# Altium PCB Ethernet_Adapter.PcbDoc
Units mm, origin at the board's own origin, x right, y up, seen from the top; angles counter-clockwise.
Board outline 62 x 23 mm, 4 copper layers ([1] Signal, [2] GND, [3] Power, [4] Signal), stack 1.586 mm thick; 58 components, 44 nets, 217 pads, 280 vias.
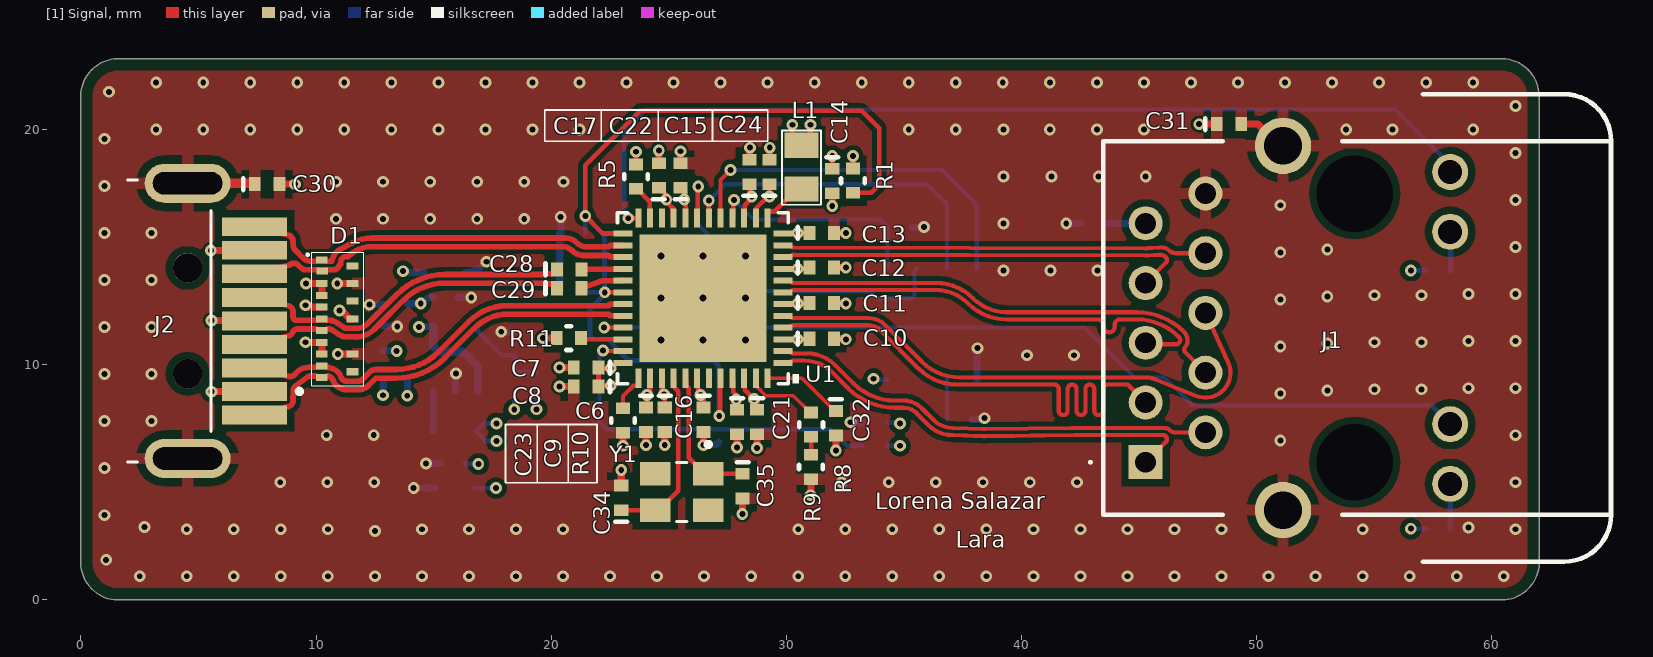
[diagram p0: [1] Signal view]
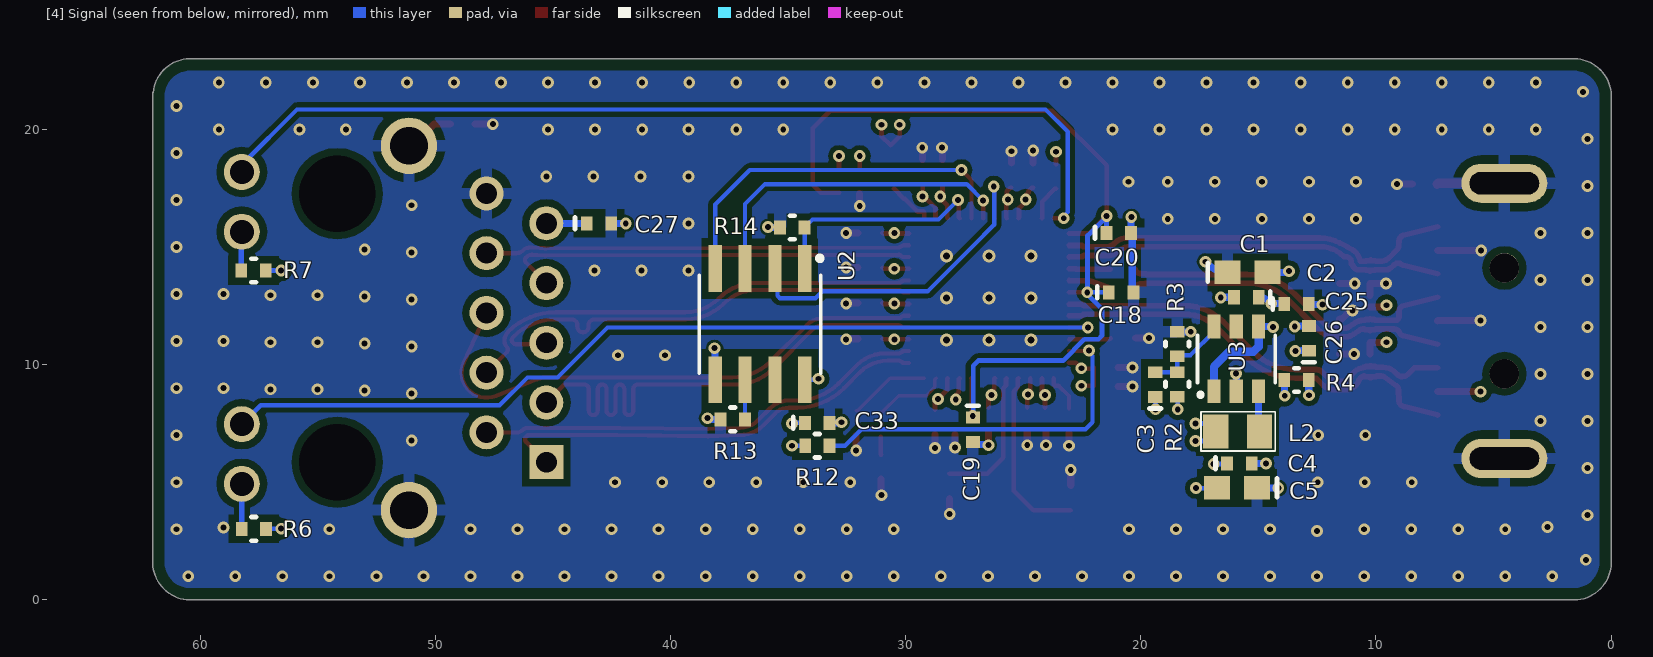
[diagram p1: [4] Signal view, seen from below]
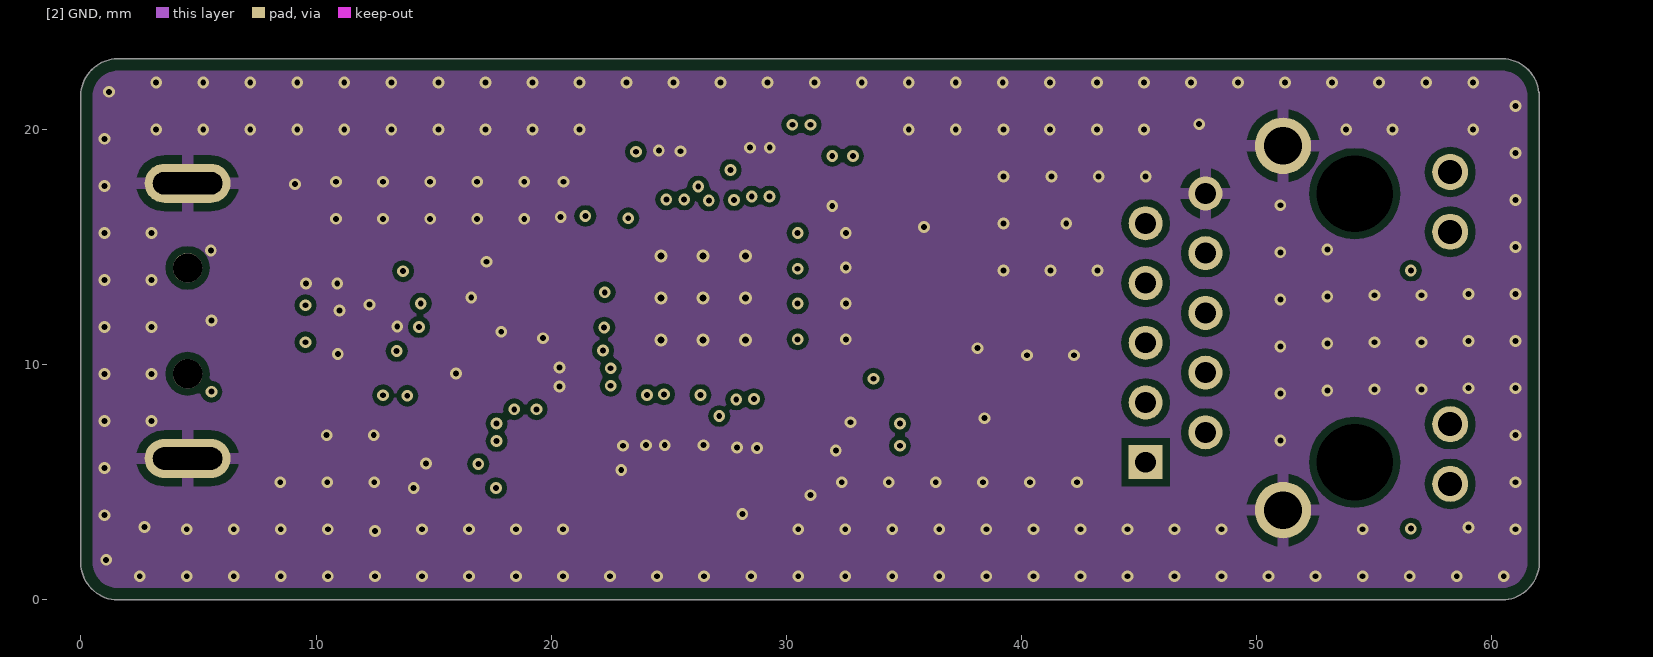
[diagram p2: [2] GND]
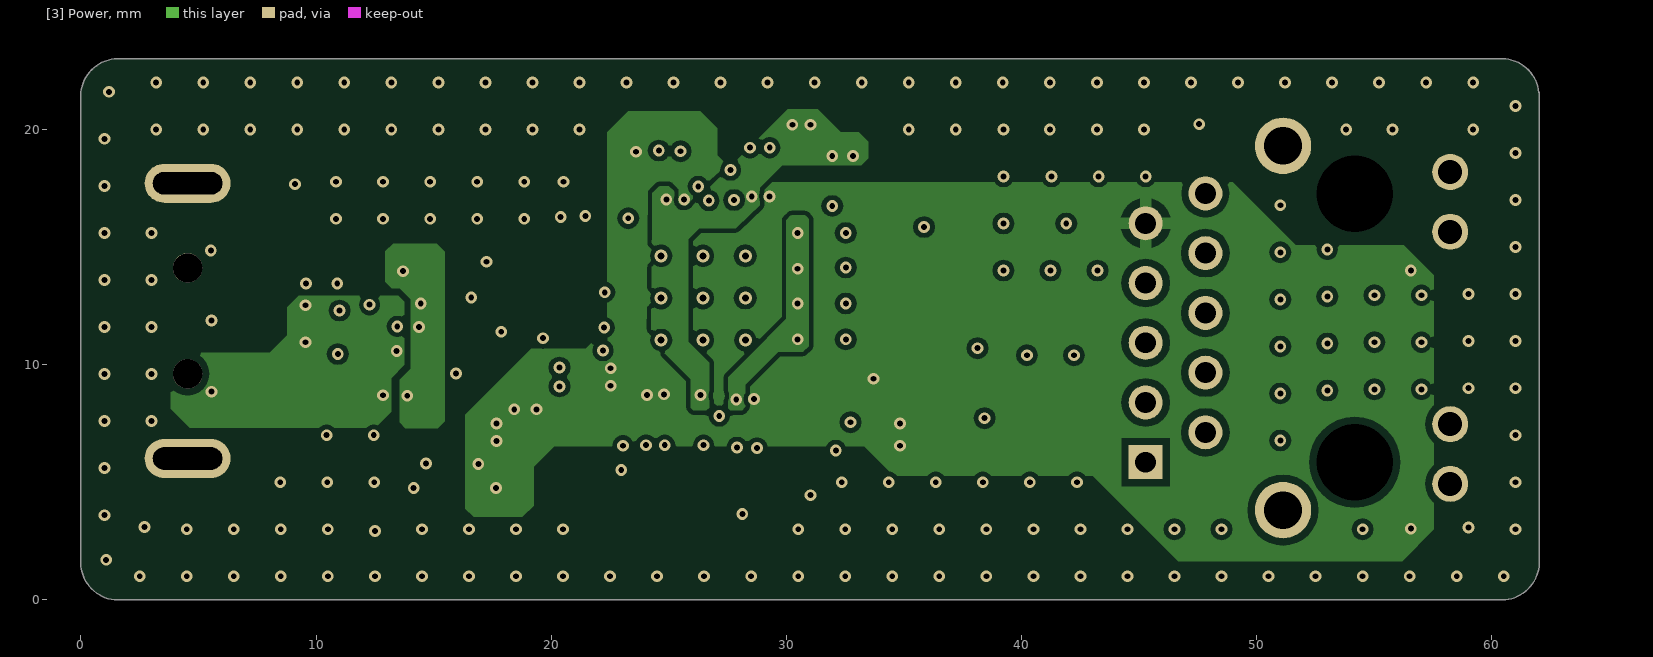
[diagram p3: [3] Power]
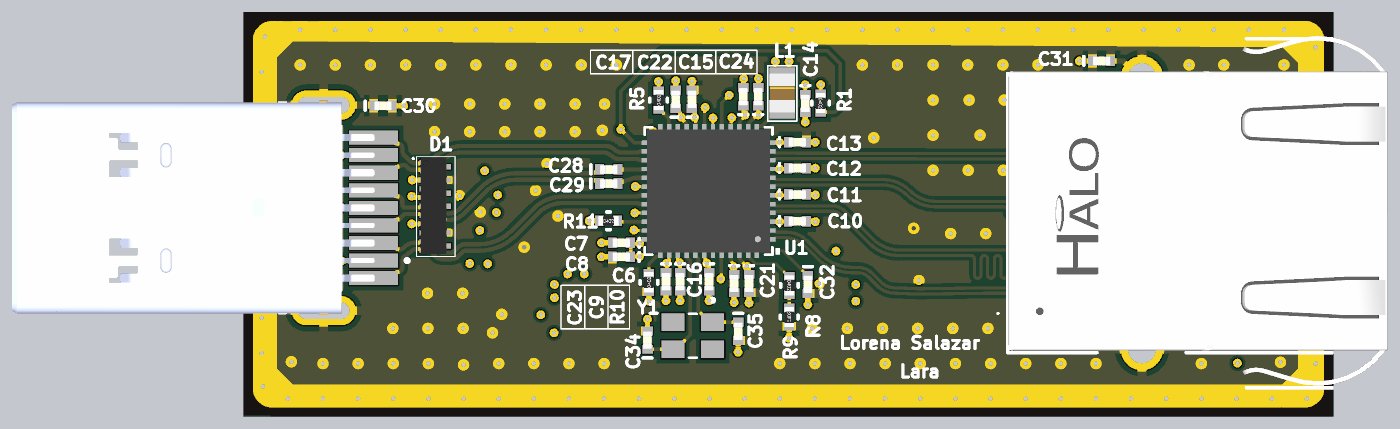
[diagram p4: 3D render of the assembled board from above, using the file's embedded part models]
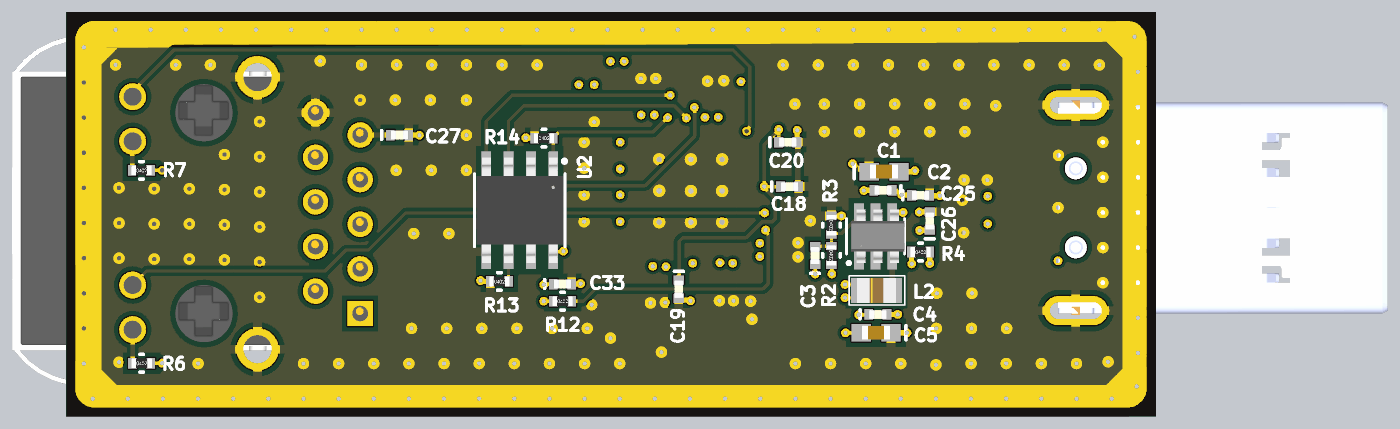
[diagram p5: 3D render of the assembled board from below, using the file's embedded part models]

## Layer stack, top to bottom
Top Solder: solder mask 0.0102, Solder Resist, Dk 3.5
[1] Signal: signal copper 0.035
Dielectric 2: prepreg 0.2104, PP-023, Dk 4.5
[2] GND: signal copper 0.0152
Dielectric 1: core 1.065, Core-043, Dk 4.3
[3] Power: signal copper 0.0152
Dielectric 3: prepreg 0.2104, PP-023, Dk 4.5
[4] Signal: signal copper 0.035
Bottom Solder: solder mask 0.0102, Solder Resist, Dk 3.5

## Board outline
0,1.432 0,21.575 cw(c1.595,21.401) 1.429,22.997 1.429,23 60.575,23 cw(c60.401,21.405) 61.997,21.571 62,21.575 62,1.425 cw(c60.405,1.599) 60.571,0.003 60.575,0 1.425,0 cw(c1.599,1.595)

## Design rules (kind name [scope] priority, off if disabled: settings)
BoardOutlineClearance [All] p1: gap=0.5 ignorepadtopadclearanceinfootprint=FALSE
Clearance [All] p1: gap=0.254 ignorepadtopadclearanceinfootprint=FALSE except(0.127: Arc-Arc Arc-Track Arc-SMDPad Arc-Via Track-Track Track-SMDPad Track-Via SMDPad-Via; 0.152: SMDPad-SMDPad; 0.203: Arc-Fill Arc-Poly Arc-Region Track-Fill Track-Poly Track-Region Via-Fill Via-Poly Via-Region Fill-Fill Fill-Poly Fill-Region Poly-Poly Poly-Region Region-Region; 0.25: Via-Via; 0.3: SMDPad-Fill SMDPad-Poly SMDPad-Region THPad-Fill THPad-Poly THPad-Region; 0.35: SMDPad-THPad THPad-THPad THPad-Via THPad-Text THPad-Hole)
DiffPairsRouting 100_OHM_DIFF [InDifferentialPairClass('100_OHM_DIFF')] p1: maxlimit=0.127 minlimit=0.127 mostfreqgap=0.127 toplayer_minwidth=0.178 toplayer_maxwidth=0.178 toplayer_prefwidth=0.178 midlayer1_minwidth=0.114 midlayer1_maxwidth=0.114 midlayer1_prefwidth=0.114 midlayer2_minwidth=0.114 midlayer2_maxwidth=0.114 midlayer2_prefwidth=0.114 bottomlayer_minwidth=0.178 bottomlayer_maxwidth=0.178 bottomlayer_prefwidth=0.178 impedanceprofiledriven=TRUE impedanceprofileid={C5B9D700-E3F4-46DA-8C66-BA4D82D806B2} impedanceprofilevalue=100.000000 maxuncoupledlength=12.7
DiffPairsRouting 90_OHM_DIFF [InDifferentialPairClass('90_OHM_DIFF')] p2: maxlimit=0.127 minlimit=0.127 mostfreqgap=0.127 toplayer_minwidth=0.24 toplayer_maxwidth=0.24 toplayer_prefwidth=0.24 midlayer1_minwidth=0.159 midlayer1_maxwidth=0.159 midlayer1_prefwidth=0.159 midlayer2_minwidth=0.159 midlayer2_maxwidth=0.159 midlayer2_prefwidth=0.159 bottomlayer_minwidth=0.24 bottomlayer_maxwidth=0.24 bottomlayer_prefwidth=0.24 impedanceprofiledriven=TRUE impedanceprofileid={D9126BFB-9540-4543-8F74-479AA3BEF8F5} impedanceprofilevalue=90.000000 maxuncoupledlength=12.7
HoleSize [All] p1: absolutevalues=TRUE maxlimit=2.54 minlimit=0.25 maxpercent=80.000 minpercent=20.000
MinimumSolderMaskSliver [All] p1: minsoldermaskwidth=0.1
PolygonConnect [All] p1: thpad.connectstyle=Relief thpad.reliefconductorwidth=0.5 thpad.reliefentries=4 thpad.polygonreliefangle="90 Angle" thpad.airgapwidth=0.35 smdpad.connectstyle=Relief smdpad.reliefconductorwidth=0.5 smdpad.reliefentries=4 smdpad.polygonreliefangle="90 Angle" smdpad.airgapwidth=0.3 via.connectstyle=Direct via.reliefconductorwidth=0.254 via.reliefentries=4 via.polygonreliefangle="90 Angle" via.airgapwidth=0.254
RoutingVias [All] p1: holewidth=0.25 width=0.5 viastyle="Through Hole" minholewidth=0.2 minwidth=0.2 maxholewidth=0.6 maxwidth=0.6
SilkToSolderMaskClearance [IsPad] p1: minsilkscreentomaskgap=0.15 clearancetoexposedcopper=TRUE
SolderMaskExpansion [All] p1: expansion=0.076 istentingtop=FALSE
Width [All] p1: maxlimit=2 minlimit=0.1 preferedwidth=0.2 minimp=50.000000 maximp=50.000000 favimp=50.000000
26 further rules are at their usual default settings.

## Classes and differential pairs
differential pair class 100_OHM_DIFF: TR0 TR1 TR2 TR3
differential pair class 90_OHM_DIFF: USB_D USB_RX USB_TX
differential pair USB_TX: +USB_TX_P -USB_TX_N
differential pair USB_RX: +USB_RX_P -USB_RX_N
differential pair USB_D: +USB_D_P -USB_D_N
differential pair TR3: +TR3_P -TR3_N
differential pair TR2: +TR2_P -TR2_N
differential pair TR1: +TR1_P -TR1_N
differential pair TR0: +TR0_P -TR0_N

## Components (designator, comment, footprint, x,y, rotation, side; value= is the part's Value field where it differs from the comment)
C1 "22uF" "Capacitor 0603" 16.345,13.925 r180 bottom
C2 "100nF" "Capacitor 0402" 16.016,12.866 r180 bottom
C3 "12pF" "Capacitor 0402" 19.382,9.658 r270 bottom
C4 "100nF" "Capacitor 0402" 15.297,5.797 r0 bottom
C5 "22uF" "Capacitor 0603" 15.018,4.756 r0 bottom
C6 "100nF" "Capacitor 0402" 24.025,7.15 r90 top
C7 "1uF" "Capacitor 0402" 20.975,9.875 r0 top
C8 "10uF" "Capacitor 0402" 20.975,9.075 r0 top
C9 "1uF" "Capacitor 0402" 27.9,7.05 r90 top
C10 "100nF" "Capacitor 0402" 32.008,11.1 r180 top
C11 "100nF" "Capacitor 0402" 32.008,12.625 r180 top
C12 "100nF" "Capacitor 0402" 32.008,14.125 r180 top
C13 "100nF" "Capacitor 0402" 32.008,15.6 r180 top
C14 "100nF" "Capacitor 0402" 31.95,17.3 r90 top
C15 "22uF" "Capacitor 0402" 28.425,18.7 r270 top
C16 "1uF" "Capacitor 0402" 26.475,7.15 r90 top
C17 "1uF" "Capacitor 0402" 24.575,18.55 r270 top
C18 "1uF" "Capacitor 0402" 20.325,13.075 r0 bottom
C19 "1uF" "Capacitor 0402" 27.139,6.725 r90 bottom
C20 "1uF" "Capacitor 0402" 20.425,15.6 r0 bottom
C21 "100nF" "Capacitor 0402" 28.75,7.05 r90 top
C22 "100nF" "Capacitor 0402" 25.5,18.55 r270 top
C23 "100nF" "Capacitor 0402" 24.825,7.15 r90 top
C24 "100nF" "Capacitor 0402" 29.275,18.7 r270 top
C25 "1uF" "Capacitor 0402" 12.867,12.575 r0 bottom
C26 "1uF" "Capacitor 0402" 12.85,11.625 r270 bottom
C27 "100nF" "Capacitor 0402" 42.529,16.008 r0 bottom
C28 "100nF" "Capacitor 0402" 21.275,14.05 r180 top
C29 "100nF" "Capacitor 0402" 21.275,13.25 r180 top
C30 "220pF" "Capacitor 0402" 8.425,17.675 r180 top
C31 "220pF" "Capacitor 0402" 49.328,20.226 r180 top
C32 "1uF" "Capacitor 0402" 32.1,7 r90 top
C33 "100nF" "Capacitor 0402" 33.25,7.525 r0 bottom
C34 "16pF" "Capacitor 0402" 22.974,4.842 r270 top
C35 "16pF" "Capacitor 0402" 28.137,4.327 r90 top
D1 "ESD7008MUTAG" ESD7008MUTAG 10.896,11.948 r270 top
J1 "HFJ11-1G01E-L12RL" HFJ111G01EL12RL 45.275,5.85 r90 top
J2 "GSB316441CEU" AMPHENOL_GSB316441CEU 4.54,11.861 r270 top
L1 "LSQNA201212T4R7M" IND_LSQN_A201212_TAY 30.638,18.4 r270 top
L2 "LSQNA201212T4R7M" IND_LSQN_A201212_TAY 15.883,7.158 r180 bottom
R1 "0" "Resistencia 0402" 32.825,17.825 r270 top
R2 "54.2K" "Resistencia 0402" 18.448,9.158 r270 bottom
R3 "12K" "Resistencia 0402" 18.448,10.878 r270 bottom
R4 "0" "Resistencia 0402" 13.375,9.35 r180 bottom
R5 "10K" "Resistencia 0402" 23.6,17.996 r90 top
R6 "220" "Resistencia 0402" 57.711,3.017 r180 bottom
R7 "220" "Resistencia 0402" 57.723,13.999 r180 bottom
R8 "1K" "Resistencia 0402" 31.05,7.45 r270 top
R9 "1K" "Resistencia 0402" 31.037,5.646 r90 top
R10 "12K" "Resistencia 0402" 23.05,7.625 r90 top
R11 "10K" "Resistencia 0402" 20.75,11.125 r0 top
R12 "1K" "Resistencia 0402" 33.75,6.55 r180 bottom
R13 "10K" "Resistencia 0402" 37.35,7.675 r180 bottom
R14 "10K" "Resistencia 0402" 34.814,15.834 r180 bottom
U1 "LAN7800/Y9X" SQFN48_7X7_Y9X_MCH 26.45,12.825 r180 top
U2 "93AA66C-I/SN" SOIC8-N_MC_MCH 36.189,11.725 r270 bottom
U3 "TLV62568PDDCR" DDC0006A_TEX 15.936,10.242 r90 bottom
Y1 "SXT32411BB17-25.000MT" XTAL_SXT32411BB17-25.000MT 25.55,4.581 r270 top

## Footprints (in the part's own frame and the unit in brackets; to place one, negate y for a bottom-side part, rotate by r counter-clockwise, add the part's x,y. Pads: shape width x height; smd on the part's side, far side on the other; paste and mask are expansions set on the pad)
AMPHENOL_GSB316441CEU [mm]
  rect 0.8x2.78 smd: 1(3,2.84) 2(1,2.84) 3(-1,2.84) 4(-3,2.84) 5(-4,2.84) 6(-2,2.84) 7(0,2.84) 8(2,2.84) 9(4,2.84)
  oval 1.66x3.66 hole 0.95 slot 2.95 at 90 deg: SH1(-5.85,0) SH2(5.85,0)
  round 1.25 hole 1.25 unplated: ""(-2.25,0) ""(2.25,0)
  silkscreen extent -6,-2.55 6,4.85, body extent -6,-17.75 6,2.9, height 3.2
"Capacitor 0402" [mm] "Capacitor 0402"
  rect 0.5x0.6 smd: 1(-0.015,0) 2(1.031,0)
  silkscreen extent 1.52,-0.25 1.52,0.25, body extent 0.01,-0.26 1.01,0.27, height 0.36
"Capacitor 0603" [mm] "Chip Capacitor 0603 SMD"
  rect 1.1x1 smd: 1(0.039,0) 2(1.739,0)
  silkscreen extent -0.81,-0.4 -0.81,0.4, body extent 0.09,-0.4 1.69,0.4, height 0.9
DDC0006A_TEX [mil]
  rect 39.5x22 smd paste+0 mask+0: 1(-54.25,37.4) 2(-54.25,0) 3(-54.25,-37.4) 4(54.25,-37.4) 5(54.25,0) 6(54.25,37.4)
  silkscreen extent -62,-65 40,65, body extent -60,-65 60,55, height 43
ESD7008MUTAG [mm]
  rect 0.3x0.5 smd: 1(-2.5,-0.65) 2(-2.032,-0.635) 3(-1.5,-0.65) 4(-1,-0.65) 5(-0.5,-0.65) 6(0,-0.65) 7(0.5,-0.65) 8(1,-0.65) 9(1.5,-0.65) 10(2,-0.65) 11(2.5,-0.65) 12(2.25,0.65) 13(1.5,0.65) 15(0,0.65) 16(-0.75,0.65) 17(-1.5,0.65) 18(-2.25,0.65)
  silkscreen extent -2.83,-1.3 2.85,1.12, body extent -2.78,-0.86 2.72,0.66, height 0.52
HFJ111G01EL12RL [mm]
  rect 1.446x1.446 hole 0.89: 1(0,0)
  round 1.446 hole 0.89: 2(1.27,-2.54) 3(2.54,0) 4(3.81,-2.54) 5(5.08,0) 6(6.35,-2.54) 7(7.62,0) 8(8.89,-2.54) 9(10.16,0) 10(11.43,-2.54)
  round 1.53 hole 1.02: 11(-0.92,-12.95) 12(1.62,-12.95) 13(9.8,-12.95) 14(12.34,-12.95)
  round 2.4 hole 1.6: 15(-2.035,-5.84) 16(13.455,-5.84)
  round 1.625 hole 3.25 unplated: 17(-0.005,-8.89) 18(11.425,-8.89)
  silkscreen extent -4.23,-19.79 15.65,2.4, body extent -4.1,-19.81 15.79,1.78, height 15.59
IND_LSQN_A201212_TAY [mil]
  rect 42x57 smd paste+0 mask+0: 1(-36.5,0) 2(36.5,0)
  silkscreen extent -61,-32 63,33, body extent -44,-29 44,29, height 57
"Resistencia 0402" [mm]
  rect 0.5x0.6 smd: 1(-0.519,0) 2(0.519,0)
  silkscreen extent -0.1,-0.5 0.1,0.5, body extent -0.57,-0.27 0.58,0.28, height 0.41
SOIC8-N_MC_MCH [mil]
  rect 78x22 smd paste+0 mask+0: 1(-93,75) 2(-93,25) 3(-93,-25) 4(-93,-75) 5(93,-75) 6(93,-25) 7(93,25) 8(93,75)
  silkscreen extent -113,-102 82,103, body extent -118,-96 118,96, height 69
SQFN48_7X7_Y9X_MCH [mil]
  rect 32x10 smd paste+0 mask+0: 1(-134,108.27) 2(-134,88.58) 3(-134,68.9) 4(-134,49.21) 5(-134,29.53) 6(-134,9.84) 7(-134,-9.84) 8(-134,-29.53) 9(-134,-49.21) 10(-134,-68.9) 11(-134,-88.58) 12(-134,-108.27) 25(134,-108.27) 26(134,-88.58) 27(134,-68.9) 28(134,-49.21) 29(134,-29.53) 30(134,-9.84) 31(134,9.84) 32(134,29.53) 33(134,49.21) 34(134,68.9) 35(134,88.58) 36(134,108.27)
  rect 10x32 smd paste+0 mask+0: 13(-108.27,-134) 14(-88.58,-134) 15(-68.9,-134) 16(-49.21,-134) 17(-29.53,-134) 18(-9.84,-134) 19(9.84,-134) 20(29.53,-134) 21(49.21,-134) 22(68.9,-134) 23(88.58,-134) 24(108.27,-134) 37(108.27,134) 38(88.58,134) 39(68.9,134) 40(49.21,134) 41(29.53,134) 42(9.84,134) 43(-9.84,134) 44(-29.53,134) 45(-49.21,134) 46(-68.9,134) 47(-88.58,134) 48(-108.27,134)
  rect 213x213 smd paste-106.5 mask+0: 49(0,0)
  silkscreen extent -160,-143 143,143, body extent -138,-138 138,138, height 39
XTAL_SXT32411BB17-25.000MT [mm]
  rect 1x1.3 smd paste+0 mask+0.102: 1(-0.775,1.125) 2(-0.775,-1.125) 3(0.775,-1.125) 4(0.775,1.125)
  silkscreen extent -2.12,-0.23 1.25,1.22

## Part data
C1 C5: library part "Capacitor 0603", "Capacitor Ceramico SMD 0603"
C2 C3 C4 C6 C7 C8 C9 C10 C11 C12 C13 C14 C15 C16 C17 C18 C19 C20 C21 C22 C23 C24 C25 C26 C27 C28 C29 C30 C31 C32 C33 C34 C35: library part "Capacitor 0402", "Capacitor Ceramico SMD 0402"
D1: "10V Clamp Ipp Tvs Diode Surface Mount 18-UDFN (5.5x1.5)", Manufacturer_Name=onsemi, Mouser Part Number=863-ESD7008MUTAG, Datasheet Link=http://www.onsemi.com/pub/Collateral/ESD7008-D.PDF, Geometry.Height=0.55mm, Manufacturer_Part_Number=ESD7008MUTAG, Mouser Price/Stock=https://www.mouser.co.uk/ProductDetail/onsemi/ESD7008MUTAG?qs=Gud3nhECO%2Fs1qvAxYTTX5w%3D%3D
J1: "Modular Connectors / Ethernet Connectors GIGABIT 1x1 Tab Down RJ45 w/mag Y/G LED 350uH min 0C ~ 70C", Manufacturer_Name="Halo Electronics", Mouser Part Number=493-HFJ111G01EL12RL, Datasheet Link=https://www.haloelectronics.com/pdf/fastjack-gigabit.pdf, Geometry.Height=15.64mm, Manufacturer_Part_Number=HFJ11-1G01E-L12RL, Mouser Price/Stock=https://www.mouser.co.uk/ProductDetail/HALO-Electronics/HFJ11-1G01E-L12RL?qs=8uu3sA0mUdsaxIpTwn1s5A%3D%3D
J2: "USB 3.2, Type A, Plug, Right Angle SMT, 9 Pins, Offset 0.95mm, 3.2mm Height, Shell Dip with Nickel Plating, 30&mu;in Gold, Blue High Temperature Housing, Tape and Reel Packaging", Package=None, Check_prices=https://www.snapeda.com/parts/GSB316441CEU/Amphenol/view-part/?ref=eda, MF=Amphenol, MP=GSB316441CEU, SnapEDA_Link=https://www.snapeda.com/parts/GSB316441CEU/Amphenol/view-part/?ref=snap
L1 L2: "4.7 µH Semiblindado Bobinado de alambre enrollado Inductivo 300 mA 520mOhm máx. 0805 (2012 métrico)", Manufacturer_Name="Taiyo Yuden", Copyright="Copyright (C) 2025 Ultra Librarian. All rights reserved.", Manufacturer_Part_Number=LSQNA201212T4R7M
R1 R2 R3 R4 R5 R6 R7 R8 R9 R10 R11 R12 R13 R14: library part "Resistencia SMD 0402", "Resistencia SMD 0402"
U1: library part LAN7800Y9X, "Description", Manufacturer_Name=Microchip, Copyright="Copyright (C) 2025 Ultra Librarian. All rights reserved.", Manufacturer_Part_Number=LAN7800/Y9X, RefDes=RefDes, Type=Type
U2: library part 93AA66C-ISN, "IC EEPROM 4KBIT MICROWIRE 8SOIC", Manufacturer_Name=Microchip, Copyright="Copyright (C) 2026 Ultra Librarian. All rights reserved.", Manufacturer_Part_Number=93AA66C-I/SN, RefDes=RefDes, Type=Type
U3: "2.5V-5.5V input, 1A high efficiency step-down buck converter in SOT23 and SOT563 package 6-SOT-23-THIN -40 to 125", Manufacturer_Name="Texas Instruments", Copyright="Copyright (C) 2026 Ultra Librarian. All rights reserved.", Manufacturer_Part_Number=TLV62568PDDCR, RefDes=RefDes, Type="Power Management"
Y1: Package=None, Availability=Unavailable, MF="{'manufacturer': u'Suntsu Electronics, Inc'}", MP=SXT32411BB17-25.000MT, Price=None

## Via types
v1: diameter 0.5, hole 0.25, [1] Signal to [4] Signal, 271 vias
v2: diameter 0.55, hole 0.3, [1] Signal to [4] Signal, 9 vias

## Nets (pads, with @x,y where several pads share a name; then routed paths per layer and width w, separated by ;. In a path a pad name is that pad's centre, name@x,y a point inside that pad or via, vN(x,y) a via of type N, cw(c..) or ccw(c..) an arc to the next point about the centre after c; other vN are vias at no path point)
+VBUS: C26.2 D1.5 D1.8 D1.9 J2.1 R4.2 | length 5
  [1] Signal w0.3: v1(5.55,8.85) 7.353,8.85 ccw(c7.353,8.888) J2.1 ; v1(9.55,10.95) 10.244,10.95 D1.8 D1.9 ; v1(9.55,12.525) 9.604,12.525 9.681,12.448 D1.5
  [4] Signal w0.3: v1(12.85,8.7) 12.856,8.706 R4.2 ; C26.2 v1@13.426,10.594 ; v1@13.458,10.594 cw(c13.458,10.532) v1@13.501,10.576
  other v1: 13.426,10.576
+VBUSF: C1.2 C2.2 C25.2 R4.1 U3.1 U3.4 | length 7.5
  [4] Signal w0.3: v1(13.7,13.975) ccw(c13.821,14.096) 13.821,13.925 C1.2 ; v1(13.875,8.675) ccw(c13.829,8.721) 13.894,8.721 R4.1 ; C25.2 cw(c13.958,12.515) 13.958,12.6 v1(14.45,12.6) 14.526,12.676 cw(c14.985,12.217) C2.2 ; v1@14.423,11.62 U3.4
  [4] Signal w0.35: v1(14.375,11.6) cw(c14.423,11.552) v1@14.423,11.62 ; U3.4 14.986,10.764 15.2,10.55 16.25,10.55 16.886,9.914 U3.1
EECS: R14.2 U1.16 U2.1 | length 9.6
  [1] Signal w0.18: U1.16 27.737,16.266 27.737,16.962 v1(27.775,17)
  [4] Signal w0.178: R14.2@34.284,15.806 cw(c34.323,15.806) R14.2
  [4] Signal w0.18: v1(27.775,17) 28.6,16.175 33.954,16.175 34.085,16.044 34.135,16.044 34.295,15.884 R14.2 ; U2.1 R14.2@34.284,15.806
EED0: U1.18 U2.3 | length 14.3
  [1] Signal w0.18: U1.18@26.701,16.229 v1@26.701,16.975
  [4] Signal w0.18: v1(26.701,16.976) 27.401,17.675 35.975,17.675 36.824,16.826 U2.3
EED1: U1.17 U2.4 | length 16
  [1] Signal w0.18: U1.17 27.2,17.85 v1(27.625,18.275)
  [4] Signal w0.18: v1(27.625,18.275) 36.625,18.275 38.094,16.806 U2.4
EEDCLK: U1.19 U2.2 | length 14.8
  [1] Signal w0.18: U1.19 26.225,16.254 26.225,17.55 v1(26.25,17.575)
  [4] Signal w0.18: v1(26.25,17.575) 26.232,17.557 26.232,15.945 27.15,15.028 29.053,13.125 33.525,13.125 33.825,12.825 35.345,12.825 35.45,12.93 35.45,13.983 U2.2
GND: C1.1 C2.1 C4.1 C5.1 C6.1 C7.1 C8.1 C9.1 C10.1 C11.1 C12.1 C13.1 C14.1 C15.1 C16.1 C17.1 C18.1 C19.1 C20.1 C21.1 C22.1 C23.1 C24.1 C25.1 C26.1 C27.1 C30.1 C30.2 C31.1 C31.2 C32.1 C33.1 C34.1 C35.1 D1.3 D1.4 D1.13 D1.15 D1.17 J1.10 J1.15 J1.16 J2.4 J2.7 J2.SH1 J2.SH2 R3.1 R9.1 R10.1 R11.1 R13.1 R14.1 U1.49 U2.5 U3.2 | length 40
  [1] Signal w0.3: v1(5.525,14.85) 7.353,14.85 ccw(c7.353,14.888) J2.4 ; v1(5.55,11.875) 7.346,11.875 cw(c7.346,11.827) J2.7 ; C30.1 v1(9.1,17.675) ; v1(9.575,13.45) 9.577,13.448 D1.3 D1.4 ; v1(10.9,13.45) 10.902,13.448 D1.17 ; v1(10.925,10.45) 10.927,10.448 D1.13 ; v1(11,12.3) 11.038,12.262 11.132,12.262 11.446,11.948 D1.15 ; v1(19.65,11.125) R11.1 ; v1(20.35,9.075) C8.1 ; v1(20.35,9.875) C7.1 ; C34.1 22.975,4.858 v1(22.975,5.525) ; v1(23.05,6.55) R10.1 ; v1@24.025,6.5 C6.1 ; C17.1 v1@24.575,19.15 ; v1@24.825,6.5 C23.1 ; C22.1 v1(25.5,19.075) ; v1@26.475,6.5 C16.1 ; v1@27.9,6.4 C9.1 ; v1(28.125,3.65) ccw(c28.097,3.678) 28.137,3.678 C35.1 ; C15.1 28.438,18.728 28.438,19.133 v1@28.475,19.133 ; v1(28.75,6.45) C21.1 ; C24.1 29.283,18.723 29.283,19.217 v1(29.292,19.225) ; v1(31.025,4.45) ccw(c30.996,4.479) 31.037,4.479 R9.1 ; v1(31.95,16.75) C14.1 ; C10.1 v1@32.615,11.1 ; C11.1 v1@32.615,12.625 ; C12.1 v1(32.525,14.125) ; C13.1 v1(32.525,15.6) ; v1(32.1,6.35) C32.1 ; v1(47.55,20.225) C31.2 ; C31.1 50.043,20.226 50.72,19.549 50.964,19.305 J1.16 ; J1.16@50.796,19.624 J1.16 ; J1.16@51.039,19.381 J1.16 ; C31.2 C31.2
  [1] Signal w0.4: J2.SH1 7.307,17.711 cw(c7.307,17.588) C30.2
  [4] Signal w0.3: v1(12.275,12.55) 12.823,12.55 12.85,12.577 C25.1 ; C26.1 13.414,11.64 cw(c13.414,11.589) v1(13.45,11.625) ; v1(14.15,4.75) 15.051,4.75 C5.1 ; v1(14.675,5.8) 14.677,5.798 15.28,5.798 C4.1 ; U3.2 15.936,9.591 cw(c15.984,9.591) v1(15.95,9.625) ; C2.1 16.561,12.866 cw(c16.561,12.811) v1(16.6,12.85) ; C1.1 ccw(c16.306,15.118) 17.149,14.274 v1(17.25,14.375) ; v1@17.8,11.4 17.803,11.397 R3.1 ; C18.1 20.36,13.125 20.36,15.55 C20.1 20.405,15.605 20.405,16.27 v1(20.4,16.275) ; v1(26.475,6.575) 26.513,6.613 27.042,6.613 C19.1 ; v1(32.725,7.55) ccw(c32.785,7.61) 32.785,7.525 C33.1 ; R14.1 35.811,15.834 ccw(c35.811,15.889) v1(35.85,15.85) ; R13.1 38.304,7.675 ccw(c38.304,7.846) v1(38.425,7.725) ; U2.5 38.094,10.625 cw(c38.2,10.625) v1(38.125,10.7) ; v1(41.9,16) 41.908,16.008 C27.1
  other v1: 2.5,1 4.5,1 6.5,1 8.5,1 10.5,1 12.5,1 14.5,1 16.5,1 18.5,1 20.5,1 22.5,1 24.5,1 26.5,1 28.5,1 30.5,1 32.5,1 34.5,1 36.5,1 38.5,1 40.5,1 42.5,1 44.5,1 46.5,1 48.5,1 50.5,1 52.5,1 54.5,1 56.5,1 58.5,1 60.5,1 1.075,1.7 12.5,2.925 4.5,3 6.5,3 8.5,3 10.5,3 14.5,3 16.5,3 18.5,3 20.5,3 30.5,3 32.5,3 34.5,3 36.5,3 38.5,3 40.5,3 42.5,3 44.5,3 46.5,3 48.5,3 54.5,3 61,3 59,3.075 2.7,3.1 1,3.6 8.475,5 10.475,5 12.475,5 32.35,5 34.35,5 36.35,5 38.35,5 40.35,5 42.35,5 61,5 1,5.6 27.9,6.475 24.025,6.575 24.825,6.575 51,6.775 10.45,7 12.45,7 61,7 1,7.6 3,7.6 51,8.775 53,8.9 55,8.95 57,8.95 59,9 61,9 1,9.6 3,9.6 40.225,10.4 42.225,10.4 51,10.775 53,10.9 55,10.95 57,10.95 59,11 61,11 32.525,11.075 17.875,11.4 1,11.6 3,11.6 32.525,12.6 51,12.775 53,12.9 55,12.95 57,12.95 59,13 61,13 1,13.6 3,13.6 39.225,14 41.225,14 43.225,14 51,14.775 53,14.9 61,15 1,15.6 3,15.6 39.225,16 10.85,16.2 12.85,16.2 14.85,16.2 16.85,16.2 18.85,16.2 51,16.775 61,17 1,17.6 10.85,17.775 12.85,17.775 14.85,17.775 16.85,17.775 18.85,17.775 20.525,17.775 39.225,18 41.275,18 43.275,18 45.275,18 61,19 24.575,19.1 28.45,19.225 1,19.6 3.2,20 5.2,20 7.2,20 9.2,20 11.2,20 13.2,20 15.2,20 17.2,20 19.2,20 21.2,20 35.2,20 37.2,20 39.225,20 41.2,20 43.2,20 45.2,20 53.8,20 55.775,20 59.2,20 61,21 1.2,21.6 3.2,22 5.2,22 7.2,22 9.2,22 11.2,22 13.2,22 15.2,22 17.2,22 19.2,22 21.2,22 23.2,22 25.2,22 27.2,22 29.2,22 31.2,22 33.2,22 35.2,22 37.2,22 39.2,22 41.2,22 43.2,22 45.2,22 47.2,22 49.2,22 51.2,22 53.2,22 55.2,22 57.2,22 59.2,22
  other v2: 24.672,11.047 26.45,11.047 28.253,11.047 24.672,12.825 26.45,12.825 28.253,12.835 24.672,14.623 26.45,14.623 28.253,14.623
LED2: J1.14 U1.24 | length 41
  [1] Signal w0.18: v1(23.275,16.225) 23.696,16.225 U1.24
  [4] Signal w0.18: v1(23.275,16.225) 23.275,16.312 23.1,16.487 23.1,19.9 24.049,20.849 55.876,20.849 58.225,18.5 J1.14
LED3: J1.12 U1.33 | length 38.5
  [1] Signal w0.18: v1(22.25,11.575) U1.33
  [4] Signal w0.18: v1(22.25,11.575) 42.675,11.575 44.793,9.457 46.08,9.457 47.263,8.275 57.42,8.275 J1.12
NetC3_1: C3.1 R2.1 R3.2 U3.6 | length 3.8
  [4] Signal w0.178: U3.6 16.886,11.398 17.881,10.402 18.405,10.402 R3.2 R2.1 18.45,9.675 19.38,9.675 C3.1
NetC28_1: C28.1 U1.28 | length 1.8
  [1] Signal w0.24: C28.1 22.742,14.05 22.767,14.075 U1.28
NetC29_1: C29.1 U1.29 | length 1.8
  [1] Signal w0.24: C29.1 22.106,13.544 cw(c22.275,13.075) 22.276,13.574 U1.29
NetC32_2: C32.2 U1.48 | length 3.5
  [1] Signal w0.15: U1.48 30.66,9.421 32.05,8.031 C32.2
NetJ1_11: J1.11 R6.1 | length 1.9
  [4] Signal w0.24: J1.11 58.225,3.022 R6.1
NetJ1_13: J1.13 R7.1 | length 1.7
  [4] Signal w0.24: J1.13 cw(c58.183,15.608) 58.242,15.608 R7.1
NetL2_2: L2.2 U3.3 | length 1.7
  [4] Signal w0.3: L2.2 14.986,7.188 U3.3
NetR5_1: R5.1 U1.23 | length 1.5
  [1] Signal w0.2: R5.1 23.65,17.477 24.192,16.935 24.192,16.237 U1.23
NetR8_1: R8.1 U1.47 | length 3.1
  [1] Signal w0.15: U1.47 28.752,9.369 28.752,9.05 29.127,8.675 30.294,8.675 31,7.969 R8.1
NetR8_2: R8.2 R9.2 | length 0.8
  [1] Signal w0.2: R9.2 31.05,6.178 R8.2
NetR10_2: R10.2 U1.37 | length 1.6
  [1] Signal w0.18: R10.2 23.05,8.664 23.491,9.105 23.663,9.105 23.7,9.142 U1.37
NetR11_2: R11.2 U1.34 | length 1.8
  [1] Signal w0.18: R11.2 ccw(c21.39,11.246) 21.39,11.075 U1.34
NetR13_2: R13.2 U2.6 | length 1.7
  [4] Signal w0.18: U2.6 36.831,9.356 R13.2
PME_CLEAR: R12.2 U1.35 | length 15.6
  [1] Signal w0.18: v1(22.2,10.6) ccw(c22.26,10.66) 22.26,10.575 U1.35
  [4] Signal w0.18: v1(22.2,10.6) 22.2,10.513 22.05,10.363 22.05,7.55 22.35,7.25 31.877,7.25 32.577,6.55 R12.2
SW_FB: C14.2 C15.2 C16.2 C17.2 L1.1 R1.1 U1.15 U1.21 U1.42 | length 7.8
  [1] Signal w0.2: C17.2 24.625,17.519 24.775,17.369 24.775,17.319 24.836,17.258 24.836,17.077 v1(24.893,17.019) 24.893,16.938 25.173,16.658 25.173,16.256 U1.21 ; U1.42 26.227,9.394 26.227,8.979 26.475,8.731 C16.2 ; U1.15 28.227,16.256 28.227,16.77 28.526,17.07 28.526,17.126 28.424,17.126 v1@28.399,17.101 ; C15.2@28.422,17.672 C15.2 v1@28.425,17.15 ; v1(30.25,20.2) 30.25,19.715 L1.1 31.025,19.714 v1(31.025,20.2) ; C14.2 v1(31.95,18.875) ; R1.1 32.826,18.345 v1(32.826,18.876)
  other v1: 26.343,8.712 28.526,17.151
SW_OUT: L1.2 U1.13 | length 2
  [1] Signal w0.2: U1.13 29.2,16.48 29.227,16.507 29.479,16.507 30.011,17.04 30.055,17.04 L1.2@30.488,17.473
TR0_N: J1.2 U1.2 | length 19.1
  [1] Signal w0.178: U1.2 30.064,10.575 cw(c30.064,10.408) 30.182,10.526 ccw(c30.3,10.644) 30.3,10.477 30.875,10.477 cw(c30.875,8.793) 32.066,9.984 32.837,9.212 ccw(c34.618,10.993) 32.84,9.21 ccw(c34.618,10.993) 34.618,8.475 34.962,8.475 cw(c34.962,7.354) 35.755,8.147 36.268,7.633 ccw(c37.051,8.416) 37.051,7.309 cw(c37.051,6.826) 37.07,7.308 38.406,7.257 ccw(c38.425,7.725) 38.431,7.257 42.125,7.305 42.445,7.309 46.063,7.309 cw(c46.063,6.979) 46.296,7.212 ccw(c46.53,7.446) 46.53,7.115 47.81,7.115 J1.2
TR0_P: J1.1 U1.1 | length 19.2
  [1] Signal w0.178: U1.1 30.064,10.075 ccw(c30.064,10.242) 30.182,10.124 cw(c30.3,10.006) 30.3,10.173 30.749,10.173 cw(c30.749,8.488) 31.94,9.679 32.622,8.997 32.625,8.994 ccw(c34.613,10.982) 32.629,8.99 ccw(c34.613,10.982) 34.613,8.17 34.96,8.17 cw(c34.96,7.349) 35.541,7.93 36.053,7.417 ccw(c37.051,8.415) 36.055,7.415 ccw(c37.051,8.415) 37.051,7.004 ; 37.052,7.004 cw(c37.051,6.826) 37.058,7.004 38.396,6.953 ccw(c38.425,7.725) 38.435,6.952 42.271,7.002 42.448,7.004 46,7.004 ; J1.1 46.126,6.701 ; 46,7.004 cw(c46,6.826) 46.079,6.985 ; 46,7.004 cw(c46,6.826) 46.079,6.985 ; 46.079,6.985 cw(c46,6.826) 46.126,6.952 ; 46.079,6.985 cw(c46,6.826) 46.126,6.952 ; 46.126,6.701 ccw(c46,6.826) 46.178,6.826 ; 46.126,6.701 ccw(c46,6.826) 46.178,6.826 ; 46.126,6.952 cw(c46,6.826) 46.178,6.826 ; 46.126,6.952 cw(c46,6.826) 46.178,6.826
TR1_N: J1.6 U1.5 | length 23.5
  [1] Signal w0.178: U1.5 30.064,12.075 cw(c30.064,11.908) 30.182,12.026 ccw(c30.3,12.144) 30.3,11.977 33.5,11.977 cw(c33.5,11.003) 34.189,11.692 35.753,10.128 ccw(c37.375,11.749) 37.375,9.456 45.275,9.456 cw(c45.275,8.39) 45.676,9.378 47.415,8.672 ccw(c47.815,9.66) 48.782,10.109 J1.6
TR1_P: J1.3 U1.4 | length 23.5
  [1] Signal w0.178: U1.4 30.064,11.575 ccw(c30.064,11.742) 30.182,11.624 cw(c30.3,11.506) 30.3,11.673 33.498,11.673 cw(c33.498,10.998) 33.975,11.475 35.627,9.823 ccw(c37.249,11.444) 37.245,9.151 ccw(c37.249,11.444) 37.249,9.151 40.923,9.151 41.39,9.151 cw(c41.39,8.962) 41.579,8.962 41.579,8.041 ccw(c41.768,8.041) 41.957,8.041 41.957,8.962 cw(c42.145,8.962) 42.334,8.962 42.334,8.041 ccw(c42.523,8.041) 42.712,8.041 42.712,8.962 cw(c42.901,8.962) 43.09,8.962 43.09,8.041 ccw(c43.279,8.041) 43.468,8.041 43.468,8.962 cw(c43.657,8.962) 43.657,9.151 44.473,9.151 44.514,9.151 J1.3
TR2_N: J1.4 U1.8 | length 20.1
  [1] Signal w0.178: U1.8 U1.8@30.064,13.575 ; J1.4 46.964,10.511 cw(c47.09,10.636) 46.912,10.636 cw(c47.09,10.636) 46.964,10.762 ccw(c46.764,10.963) 47.048,10.963 47.048,11.046 ccw(c46.568,11.046) 46.907,11.385 46.895,11.398 ccw(c44.886,9.388) 44.886,12.23 39.355,12.23 cw(c39.355,14.23) 39.351,12.23 cw(c39.355,14.23) 37.941,12.816 37.937,12.819 ccw(c36.347,11.229) 36.347,13.477 32.264,13.477 30.3,13.477 ; U1.8@30.064,13.575 cw(c30.064,13.408) U1.8@30.182,13.526 ; U1.8@30.064,13.575 cw(c30.064,13.408) U1.8@30.182,13.526 ; U1.8@30.182,13.526 ccw(c30.3,13.644) 30.3,13.477 ; U1.8@30.182,13.526 ccw(c30.3,13.644) 30.3,13.477
TR2_P: J1.5 U1.7 | length 19.8
  [1] Signal w0.178: U1.7 30.064,13.075 ccw(c30.064,13.242) 30.117,13.084 ccw(c30.064,13.242) 30.182,13.124 cw(c30.3,13.006) 30.247,13.164 cw(c30.3,13.006) 30.3,13.173 36.343,13.173 cw(c36.343,11.218) 37.725,12.6 37.727,12.598 ccw(c39.351,14.221) 39.348,11.925 ccw(c39.351,14.221) 39.351,11.925 42.674,11.925 43.241,11.925 cw(c43.241,11.686) 43.48,11.686 43.48,11.612 ccw(c43.719,11.612) 43.958,11.612 43.958,11.686 cw(c44.197,11.686) 44.197,11.925 44.575,11.925 44.884,11.925 cw(c44.884,9.385) 46.68,11.181 46.691,11.171 cw(c46.565,11.045) 46.743,11.045 cw(c46.565,11.045) 46.691,10.919 cw(c46.565,11.045) 46.565,10.867 45.427,10.867 cw(c45.427,11.082) J1.5
TR3_N: J1.8 U1.11 | length 18.1
  [1] Signal w0.178: U1.11 30.064,15.075 cw(c30.064,14.908) 30.182,15.026 ccw(c30.3,15.144) 30.3,14.977 ; 30.301,14.977 cw(c30.304,14.495) 30.306,14.977 45.273,14.944 ccw(c45.275,16.01) 45.338,14.946 45.853,14.976 cw(c45.883,14.495) 45.883,14.977 45.98,14.977 cw(c45.98,14.564) 46.272,14.856 ccw(c46.564,15.148) 46.564,14.735 47.81,14.735 J1.8
TR3_P: J1.7 U1.10 | length 17.8
  [1] Signal w0.178: U1.10 30.064,14.575 ccw(c30.064,14.742) 30.182,14.624 cw(c30.3,14.506) 30.3,14.673 30.304,14.673 ; 30.305,14.673 45.272,14.639 ccw(c45.275,16.01) 45.356,14.642 45.872,14.672 cw(c45.883,14.495) 45.882,14.673 ; J1.7 46.126,14.321 ccw(c46,14.446) 46.178,14.446 ccw(c46,14.446) 46.126,14.572 ccw(c45.883,14.329) 45.883,14.673
USB_D_N: C29.2 D1.7 J2.2 | length 14
  [1] Signal w0.24: J2.2 8.83,11.221 ccw(c8.77,11.461) 8.998,11.367 cw(c9.22,11.275) 9.22,11.515 9.993,11.515 cw(c9.993,11.452) 10.037,11.496 ccw(c10.081,11.54) 10.081,11.478 10.173,11.478 cw(c10.173,11.375) D1.7 cw(c10.318,11.375) 10.318,11.478 10.41,11.478 ccw(c10.41,11.54) 10.454,11.496 cw(c10.498,11.452) 10.498,11.515 10.555,11.515 cw(c10.554,11.275) 10.692,11.471 10.945,11.295 ccw(c11.296,11.798) 11.281,11.185 11.675,11.175 ccw(c11.684,11.542) 11.684,11.175 11.704,11.175 ccw(c11.704,12.236) 12.453,11.485 12.684,11.716 13.691,12.723 cw(c15.487,10.927) 15.487,13.467 19.743,13.467 cw(c19.743,13.404) 19.787,13.448 ccw(c19.831,13.492) 19.831,13.43 19.98,13.43 cw(c19.98,13.107) 20.209,13.335 cw(c20.123,13.25) C29.2
USB_D_P: C28.2 D1.6 J2.3 | length 14.4
  [1] Signal w0.24: J2.3 8.829,12.501 cw(c8.77,12.261) 9.017,12.261 9.017,12.121 9.017,12.07 ccw(c9.257,12.07) 9.087,11.901 9.107,11.881 9.993,11.881 ccw(c9.993,11.944) 10.037,11.9 cw(c10.081,11.856) 10.081,11.918 10.173,11.918 ccw(c10.173,12.021) D1.6 ccw(c10.318,12.021) 10.318,11.918 10.41,11.918 cw(c10.41,11.856) 10.454,11.9 ccw(c10.498,11.944) 10.498,11.881 ; 10.5,11.881 10.552,11.881 cw(c10.554,11.275) 10.902,11.772 11.154,11.596 ccw(c11.296,11.798) 11.29,11.551 11.683,11.542 11.704,11.542 ccw(c11.704,12.236) 12.195,11.745 13.433,12.983 cw(c15.486,10.929) 15.486,13.833 19.743,13.833 ccw(c19.743,13.896) 19.787,13.852 cw(c19.831,13.808) 19.831,13.87 19.98,13.87 ccw(c19.98,14.193) 20.209,13.965 ccw(c20.123,14.05) C28.2
USB_RX_N: D1.1 J2.5 U1.26 | length 16.9
  [1] Signal w0.24: J2.5 8.829,15.501 cw(c8.77,15.261) 9.016,15.279 9.036,15.033 ccw(c9.274,15.052) 9.105,14.883 9.448,14.54 ccw(c9.8,14.893) 9.8,14.394 9.99,14.394 ccw(c9.99,14.434) 10.018,14.406 cw(c10.047,14.377) 10.047,14.418 10.148,14.418 ccw(c10.148,14.521) 10.221,14.448 ccw(c10.293,14.521) 10.293,14.418 10.386,14.418 cw(c10.386,14.358) 10.428,14.4 10.659,14.4 10.659,14.408 10.66,14.41 10.725,14.574 cw(c11.296,14.348) 10.908,14.823 cw(c11.296,14.348) 11.007,14.889 11.532,15.17 cw(c12.389,13.571) 12.389,15.386 20.608,15.386 cw(c20.608,14.741) 21.064,15.197 ccw(c21.519,15.653) 21.517,15.008 ccw(c21.519,15.653) 21.519,15.008 22.396,15.008 ccw(c22.396,15.11) 22.468,15.038 cw(c22.539,14.966) 22.539,15.068 23.039,15.068 U1.26
USB_RX_P: D1.2 J2.6 U1.27 | length 16.4
  [1] Signal w0.24: J2.6 8.83,14.221 ccw(c8.77,14.461) 8.918,14.263 cw(c9.06,14.07) 9.23,14.239 9.335,14.134 ccw(c9.593,14.393) 9.593,14.027 10.028,14.027 ccw(c10.07,14.069) 10.07,14.01 10.163,14.01 cw(c10.163,13.907) 10.236,13.98 cw(c10.308,13.907) 10.308,14.01 10.409,14.01 ccw(c10.409,14.05) 10.438,14.022 cw(c10.466,13.993) 10.466,14.034 10.746,14.034 ccw(c10.746,14.273) 10.969,14.186 11.001,14.266 11.011,14.256 11.026,14.256 11.037,14.266 11.045,14.316 ccw(c10.809,14.358) 11.049,14.353 cw(c11.296,14.348) 11.296,14.595 11.365,14.595 cw(c12.389,13.571) 12.389,15.019 20.456,15.019 cw(c20.456,14.375) 20.912,14.83 ccw(c21.367,15.286) 21.365,14.642 ccw(c21.367,15.286) 21.367,14.642 22.396,14.642 cw(c22.396,14.54) 22.468,14.612 ccw(c22.539,14.684) 22.539,14.582 23.039,14.582 U1.27
USB_TX_N: D1.10 J2.8 U1.31 | length 17.3
  [1] Signal w0.24: J2.8 8.37,9.861 8.666,9.565 ccw(c8.826,9.744) 8.798,9.506 cw(c8.77,9.261) 8.834,9.499 ccw(c8.895,9.731) 9.044,9.544 9.056,9.553 ccw(c8.906,9.74) 9.074,9.569 ; 9.075,9.57 9.172,9.667 cw(c9.69,9.148) 9.69,9.881 9.968,9.881 ccw(c9.968,9.944) 10.012,9.9 cw(c10.056,9.855) 10.056,9.918 10.148,9.918 ccw(c10.148,10.021) D1.10@10.221,9.948 ; D1.10 ccw(c10.318,10.021) 10.318,9.918 10.41,9.918 cw(c10.41,9.856) 10.454,9.9 ccw(c10.498,9.944) 10.498,9.881 cw(c10.498,9.515) 10.57,9.874 cw(c10.452,9.279) 10.72,9.824 10.758,9.805 cw(c10.493,9.26) 11.063,9.464 ccw(c11.296,9.548) 11.296,9.301 11.796,9.301 ccw(c11.796,9.548) 11.97,9.373 12.281,9.684 cw(c12.54,9.425) 12.54,9.792 13.404,9.792 ccw(c13.404,12.332) 15.2,10.536 16.485,11.82 ; 16.485,11.82 cw(c18.147,10.158) 18.147,12.508 22.396,12.508 ccw(c22.396,12.61) 22.468,12.538 cw(c22.539,12.466) 22.539,12.568 23.039,12.568 U1.31
USB_TX_P: D1.11 J2.9 U1.32 | length 17.9
  [1] Signal w0.24: J2.9 8.83,8.221 ccw(c8.77,8.461) 9.017,8.45 9.039,8.927 cw(c9.279,8.916) 9.137,9.109 9.624,9.468 cw(c9.766,9.275) 9.766,9.515 9.968,9.515 cw(c9.968,9.452) 10.012,9.496 ccw(c10.056,9.54) 10.056,9.478 10.148,9.478 cw(c10.148,9.375) D1.11@10.221,9.448 ; D1.11 cw(c10.318,9.375) 10.318,9.478 10.41,9.478 ccw(c10.41,9.54) 10.454,9.496 cw(c10.498,9.452) 10.498,9.515 10.5,9.514 cw(c10.452,9.279) 10.559,9.494 10.598,9.475 cw(c10.493,9.26) 10.718,9.341 ccw(c11.296,9.548) 11.296,8.934 11.796,8.934 ccw(c11.796,9.548) 12.23,9.114 12.54,9.425 13.407,9.425 ccw(c13.407,12.325) 15.458,10.274 16.742,11.558 ; 16.742,11.559 cw(c18.15,10.15) 18.15,12.142 22.396,12.142 cw(c22.396,12.04) 22.468,12.112 ccw(c22.539,12.184) 22.539,12.082 23.039,12.082 U1.32
VDD3_REG: C3.2 C4.2 C5.2 C6.2 C7.2 C8.2 C21.2 C22.2 C23.2 C24.2 C27.2 C33.2 J1.9 L2.1 R2.2 R5.2 R6.2 R7.2 R12.1 U1.14 U1.20 U1.36 U1.38 U1.39 U1.46 U2.8 | length 19.7
  [1] Signal w0.2: v1(22.525,9.1) 22.031,9.1 C8.2 C7.2 22.056,9.825 22.517,9.825 22.767,10.075 U1.36 ; R5.2 v1(23.6,19.05) ; C6.2@24.075,8.181 24.075,8.65 24.2,8.775 U1.38 ; U1.39 24.7,8.742 24.825,8.617 C23.2 ; C22.2 25.55,17.519 25.7,17.369 25.7,16.969 25.713,16.957 25.713,16.241 U1.20 ; U1.46 28.227,9.394 28.227,8.928 v1(28.618,8.537) ; v1@28.667,8.6 28.75,8.6 C21.2 ; U1.14 28.727,16.256 28.727,16.674 29.178,17.125 29.275,17.125 C24.2
  [4] Signal w0.2: C4.2 16.35,5.775 v1(16.9,5.775) ; C5.2 16.763,4.75 v1(17.65,4.75) ; v1(17.675,6.75) 17.218,6.75 L2.1 17.152,7.5 v1(17.675,7.5) ; v1(18.425,8.1) 18.425,8.616 R2.2 ; v1(19.375,8.1) 19.375,8.62 C3.2 ; v1(33.7,9.4) ccw(c33.79,9.49) 33.79,9.363 U2.8 ; R12.1 v1(34.825,6.55) ; C33.2 34.765,7.525 cw(c34.765,7.44) v1(34.825,7.5) ; J1.9 J1.9 ; v1(56.55,3.025) 56.558,3.017 R6.2 ; v1(56.55,14) 56.551,13.999 R7.2
  [4] Signal w0.3: C27.2 J1.9
  other v1: 24.068,8.712 24.793,8.737 22.526,9.847 25.65,17.019 29.276,17.151
VDD12A: C18.2 C19.2 C20.2 R1.2 U1.25 U1.30 U1.44 | length 39.5
  [1] Signal w0.2: v1(22.275,13.075) U1.30 ; U1.25 22.2,15.575 v1(21.45,16.325) 21.45,18.475 23.775,20.8 33.2,20.8 33.942,20.058 33.942,17.642 33.606,17.306 R1.2 ; v1(27.143,7.812) 27.173,7.842 27.173,9.394 U1.44
  [4] Signal w0.2: C18.2 v1(22.275,13.075) ; v1@21.425,16.325 v1@21.453,16.297 ; v1(21.45,16.325) 21.453,16.322 v1@21.453,16.297 ; C20.2 21.453,15.603 v1@21.453,16.297 ; C19.2 27.125,7.77 27.125,9.95 26.9,10.175 23.302,10.175 22.398,11.079 21.796,11.079 21.65,11.225 21.65,12.375 22.275,13 v1(22.275,13.075) ; v1@21.453,16.297 22.263,15.487 22.263,13.087 v1(22.275,13.075)
VDD25_REG: C9.2 C10.2 C11.2 C12.2 C13.2 U1.3 U1.6 U1.9 U1.12 U1.45 | length 5.5
  [1] Signal w0.18: U1.45 27.737,9.384 27.737,8.83 27.893,8.674 v1@27.893,8.587
  [1] Signal w0.2: U1.3 30.952,11.075 C10.2 ; U1.6 30.927,12.575 C11.2 ; U1.9 30.927,14.075 C12.2 ; U1.12 30.952,15.575 C13.2
  other v1: 27.868,8.512 30.476,11.076 30.476,12.601 30.476,14.076 30.476,15.601
XI: C34.2 U1.40 Y1.3 | length 7.6
  [1] Signal w0.2: C34.2 24.42,3.811 Y1.3 24.575,3.806 25.4,4.631 25.4,8.867 25.227,9.04 25.227,9.394 U1.40
XO: C35.2 U1.41 Y1.1 | length 6
  [1] Signal w0.2: U1.41 25.727,9.394 25.727,9.115 25.846,8.996 25.846,6.035 26.525,5.356 Y1.1 26.677,5.358 C35.2
pads on no net: D1.12 D1.16 D1.18 J1.17 J1.18 J2. U1.22 U1.43 U2.7 U3.5 Y1.2 Y1.4

## Polygon pours and split planes (outlines as drawn)
VDD3_REG on [3] Power "VDD3_REG" (solid, pour order 3): 28.2,17.75 27.05,18.9 27.05,20.05 26.325,20.775 23.275,20.775 22.375,19.875 22.375,11.575 21.475,10.675 19.15,10.675 16.35,7.875 16.35,3.875 16.7,3.525 18.775,3.525 19.25,4 19.25,5.65 20.125,6.525 33.3,6.525 34.55,5.275 43.025,5.275 46.65,1.65 56.175,1.65 57.525,3 57.525,13.8 56.25,15.075 52.4,15.075 51.625,15.1 48.975,17.75
VDD25_REG on [3] Power "VDD25_REG" (solid, pour order 2): 30,16.15 30.2,16.35 30.4,16.35 30.8,16.35 30.95,16.2 30.95,10.775 30.709,10.55 29.65,10.55 28.25,9.15 28.25,8.2 28.1,8.05 27.6,8.05 27.525,8.125 27.525,9.475 30,11.95
SW_FB on [3] Power "SW_FB" (solid, pour order 5): 29.8,20.6 30.05,20.85 31.325,20.85 31.55,20.625 32.3,19.875 33.075,19.875 33.475,19.475 33.475,18.775 33.175,18.475 29.825,18.475 28.875,17.525 28.875,16.792 27.835,15.8 26.3,15.8 25.825,15.325 25.825,10.975 26.725,10.075 26.725,8.175 26.6,8.05 26.05,8.05 25.925,8.175 25.925,9.375 24.25,11.05 24.3,17.325 24.562,17.587 25.012,17.587 25.223,17.377 25.223,16.793 25.424,16.592 25.792,16.592
+VBUS on [3] Power "+VBUS" (solid, pour order 0): 13.75,10 13.2,9.411 13.2,8 12.525,7.325 4.625,7.325 3.825,8.125 3.825,9.65 4.675,10.5 8.025,10.5 8.77,11.245 8.77,12.442 9.253,12.925 13.49,12.925 13.75,12.665
+VBUSF on [3] Power "+VBUSF" (solid, pour order 1): 13.55,13.25 13.225,13.25 12.95,13.525 12.95,13.85 12.95,14.825 13.275,15.15 15.125,15.15 15.475,14.8 15.475,7.6 15.175,7.3 13.8,7.3 13.55,7.55 13.55,9.35 13.737,9.537 14.025,9.825 14.025,10.401 14.025,12.775 13.687,13.112
GND on [1] Signal "GND" (solid, pour order 6): -0.05,-0.175 0,-0.125 0,23.05 61.9,23.05 61.95,23 61.95,-0.075 0,-0.075 -0.025,-0.1
GND on [2] GND "GND" (solid, pour order 8): -0.05,23.05 62.2,23.05 62.2,-0.025 62.125,0.05 -0.15,0.05 -0.15,23.075 0,23.075
GND on [4] Signal "GND" (solid, pour order 7): 0,23.025 0.025,23.05 62.075,23.05 62.075,-0.325 61.95,-0.2 -0.05,-0.2 -0.05,22.8 0.2,23.05

## Silkscreen, mask and mechanical layers (free items; w line width, h text height)
Top Overlay:
  lines w0.076: 19.4,4.975 19.4,7.425 ; 20.725,4.975 20.725,7.45 ; 22.125,19.5 22.125,20.8 ; 24.55,19.525 24.55,20.825 ; 26.85,19.5 26.85,20.8 ; 18.05,4.975 18.05,7.45 21.95,7.45 21.95,4.975 18.05,4.975 ; 19.725,19.498 29.202,19.498 29.202,20.825 19.725,20.825 19.725,19.498
  text "Lorena Salazar" at 33.77,3.845 h0.7
  text "Lara" at 37.195,2.22 h0.7
Top Solder:
  region: 60.047,21.012 59.122,21.012 60.047,20.087
  region: 59.987,1.778 59.987,2.703 59.062,1.778
  region: 1.875,1.775 2.8,1.775 1.875,2.7
  region: 1.875,21.35 1.875,20.425 2.8,21.35
  region: 3.275,20.25
  region: 1.5,0 1.5,1.8 60,1.8 60,21 1.875,21.35 1.875,0.05 -0.025,0.05 -0.025,23.025 0.025,23.075 62,23.075 62,0
Bottom Solder:
  region: 60.025,1.75 60.025,2.675 59.1,1.75
  region: 60,20.975 59.075,20.975 60,20.05
  region: 1.875,21.325 1.875,20.4 2.8,21.325
  region: 1.875,1.775 2.8,1.775 1.875,2.7
  region: 1.5,-0.025 1.5,1.775 60,1.775 60,20.975 1.875,21.325 1.875,0.025 -0.025,0.025 -0.025,23 0.025,23.05 62,23.05 62,-0.025
Mechanical 1:
  lines w0.076: 0,1.432 0,21.568 ; 0,21.575 cw(c1.595,21.401) 1.429,22.997 ; 0.003,1.429 ccw(c1.599,1.595) 1.425,0 ; 1.429,23 60.575,23 cw(c60.401,21.405) 61.997,21.571 ; 1.432,0 60.575,0 ; 60.571,0.003 ccw(c60.405,1.599) 62,1.425 62,21.575

## Text inside footprints (layer, text, board x,y; h text height)
J2: Mechanical 13 "PCB Edge" at 3.125,3.2 h0.81 r270